# EAGLE board Main Board PCB v29 (EAGLE 9.7.0)
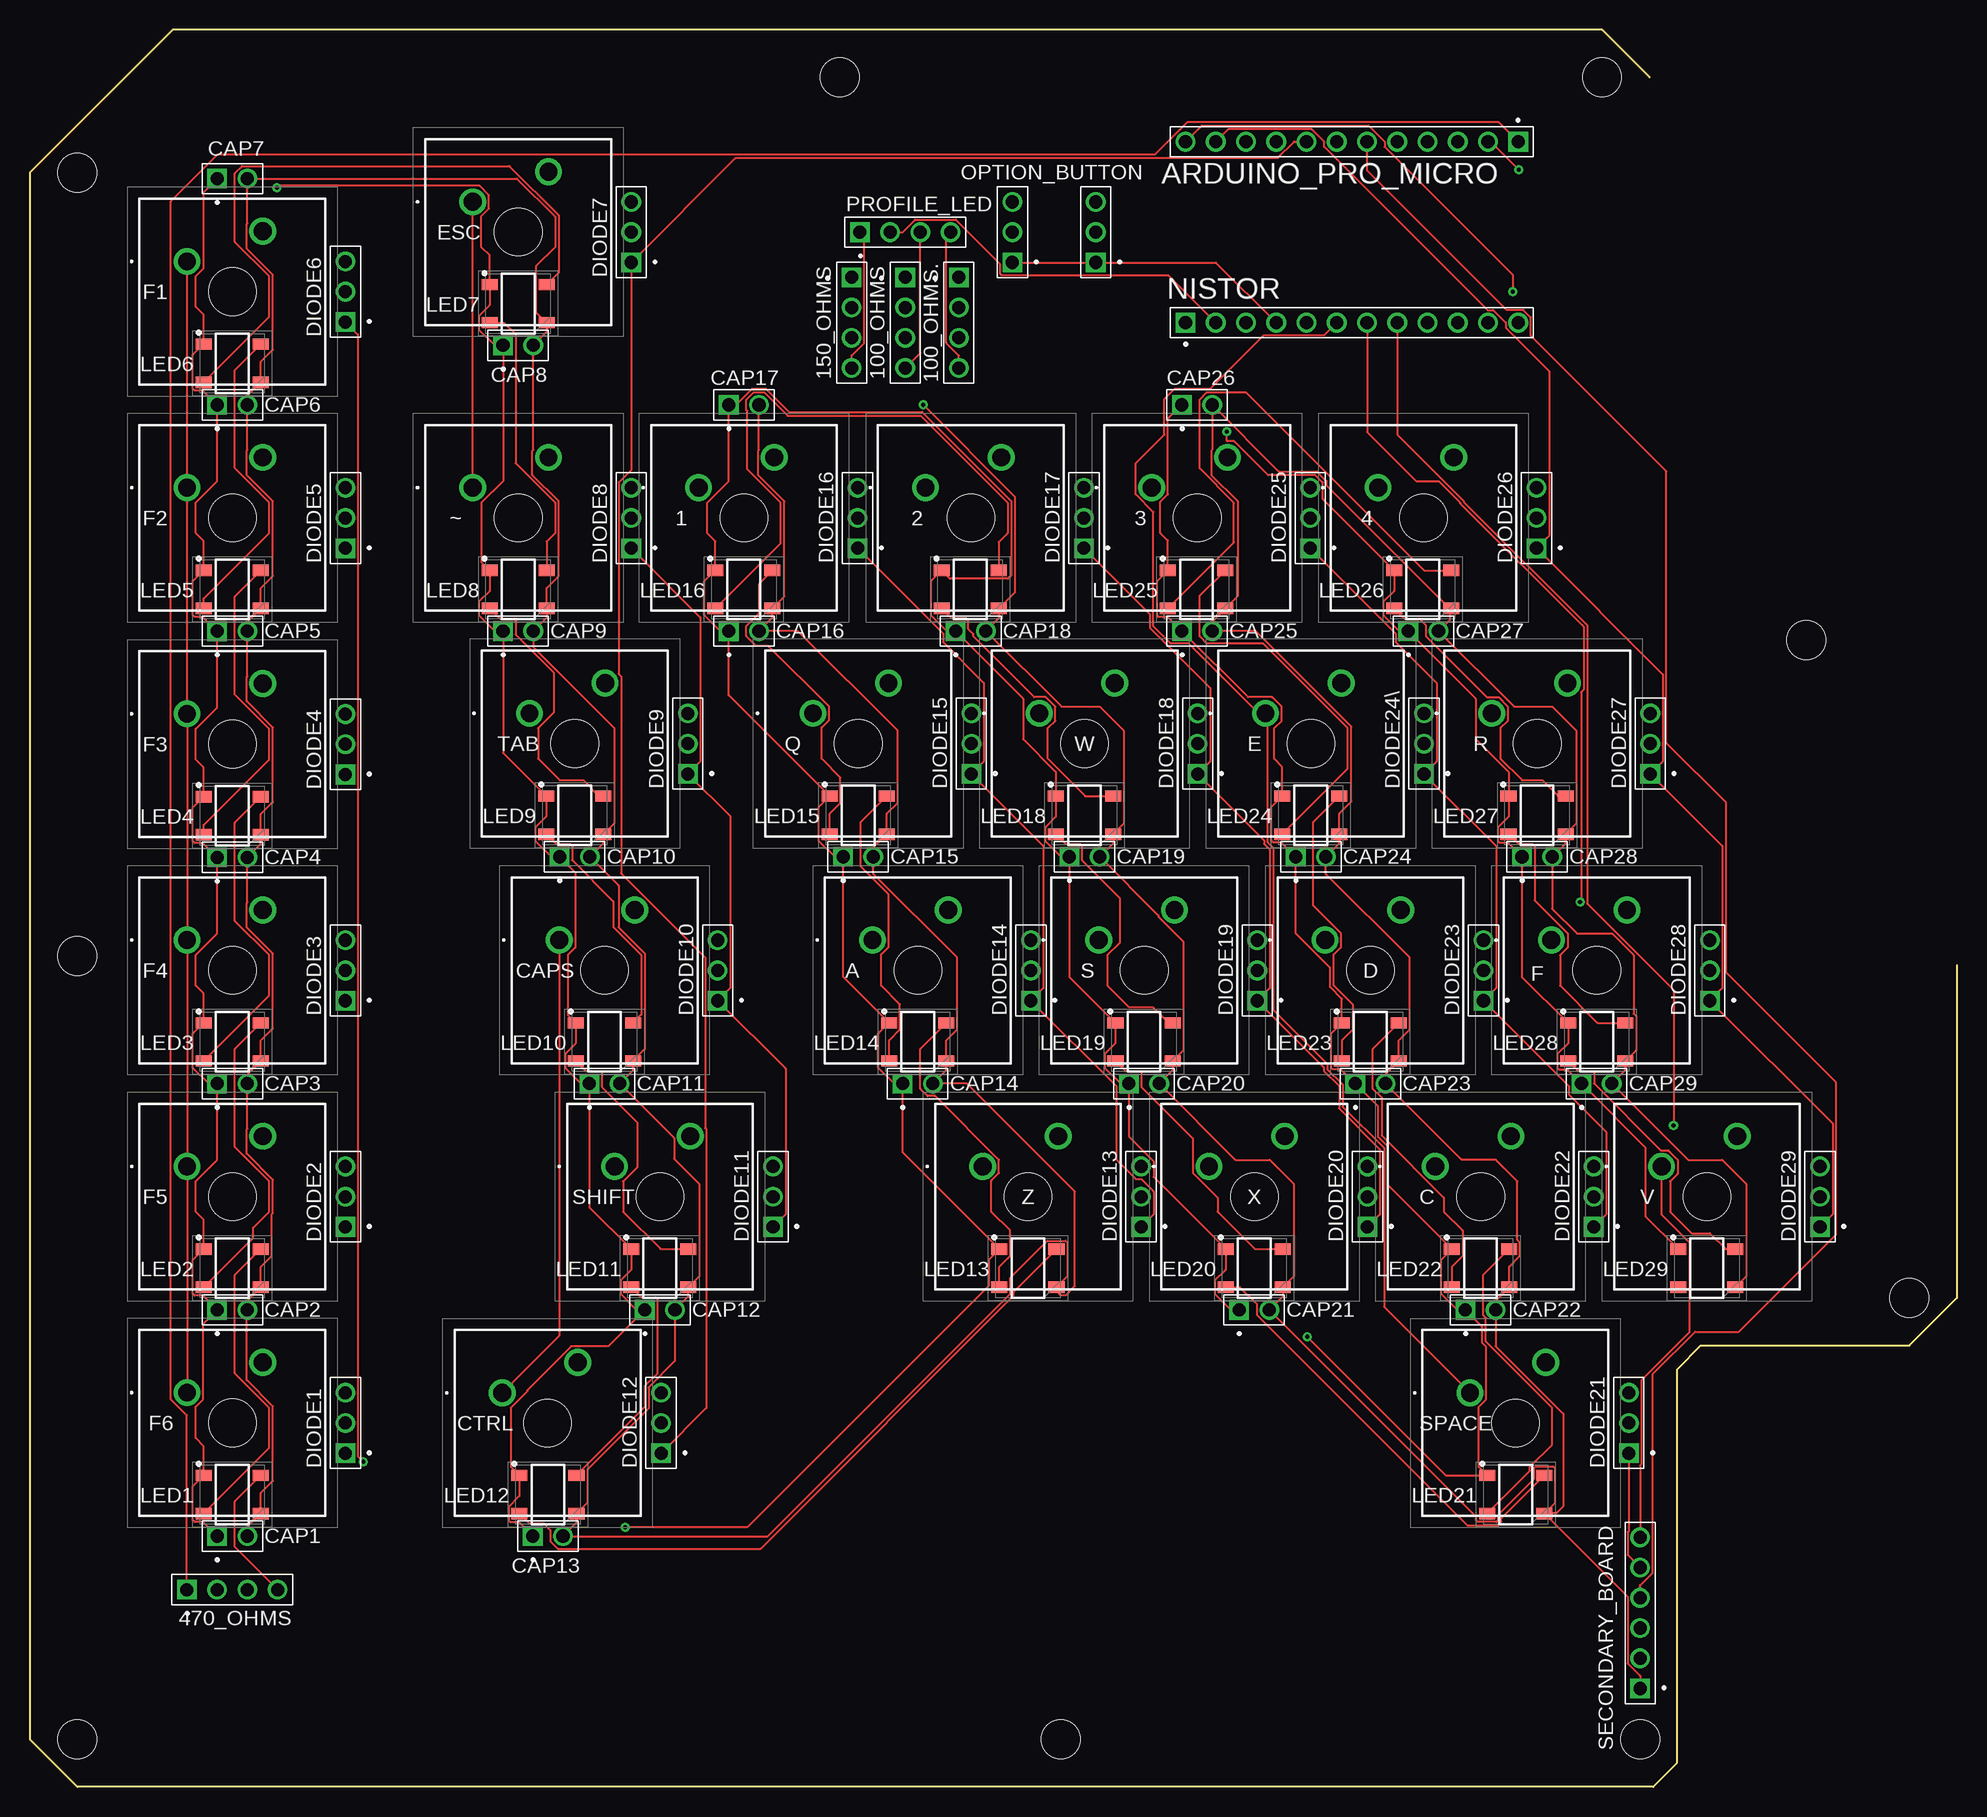
[diagram p0: board, top side]
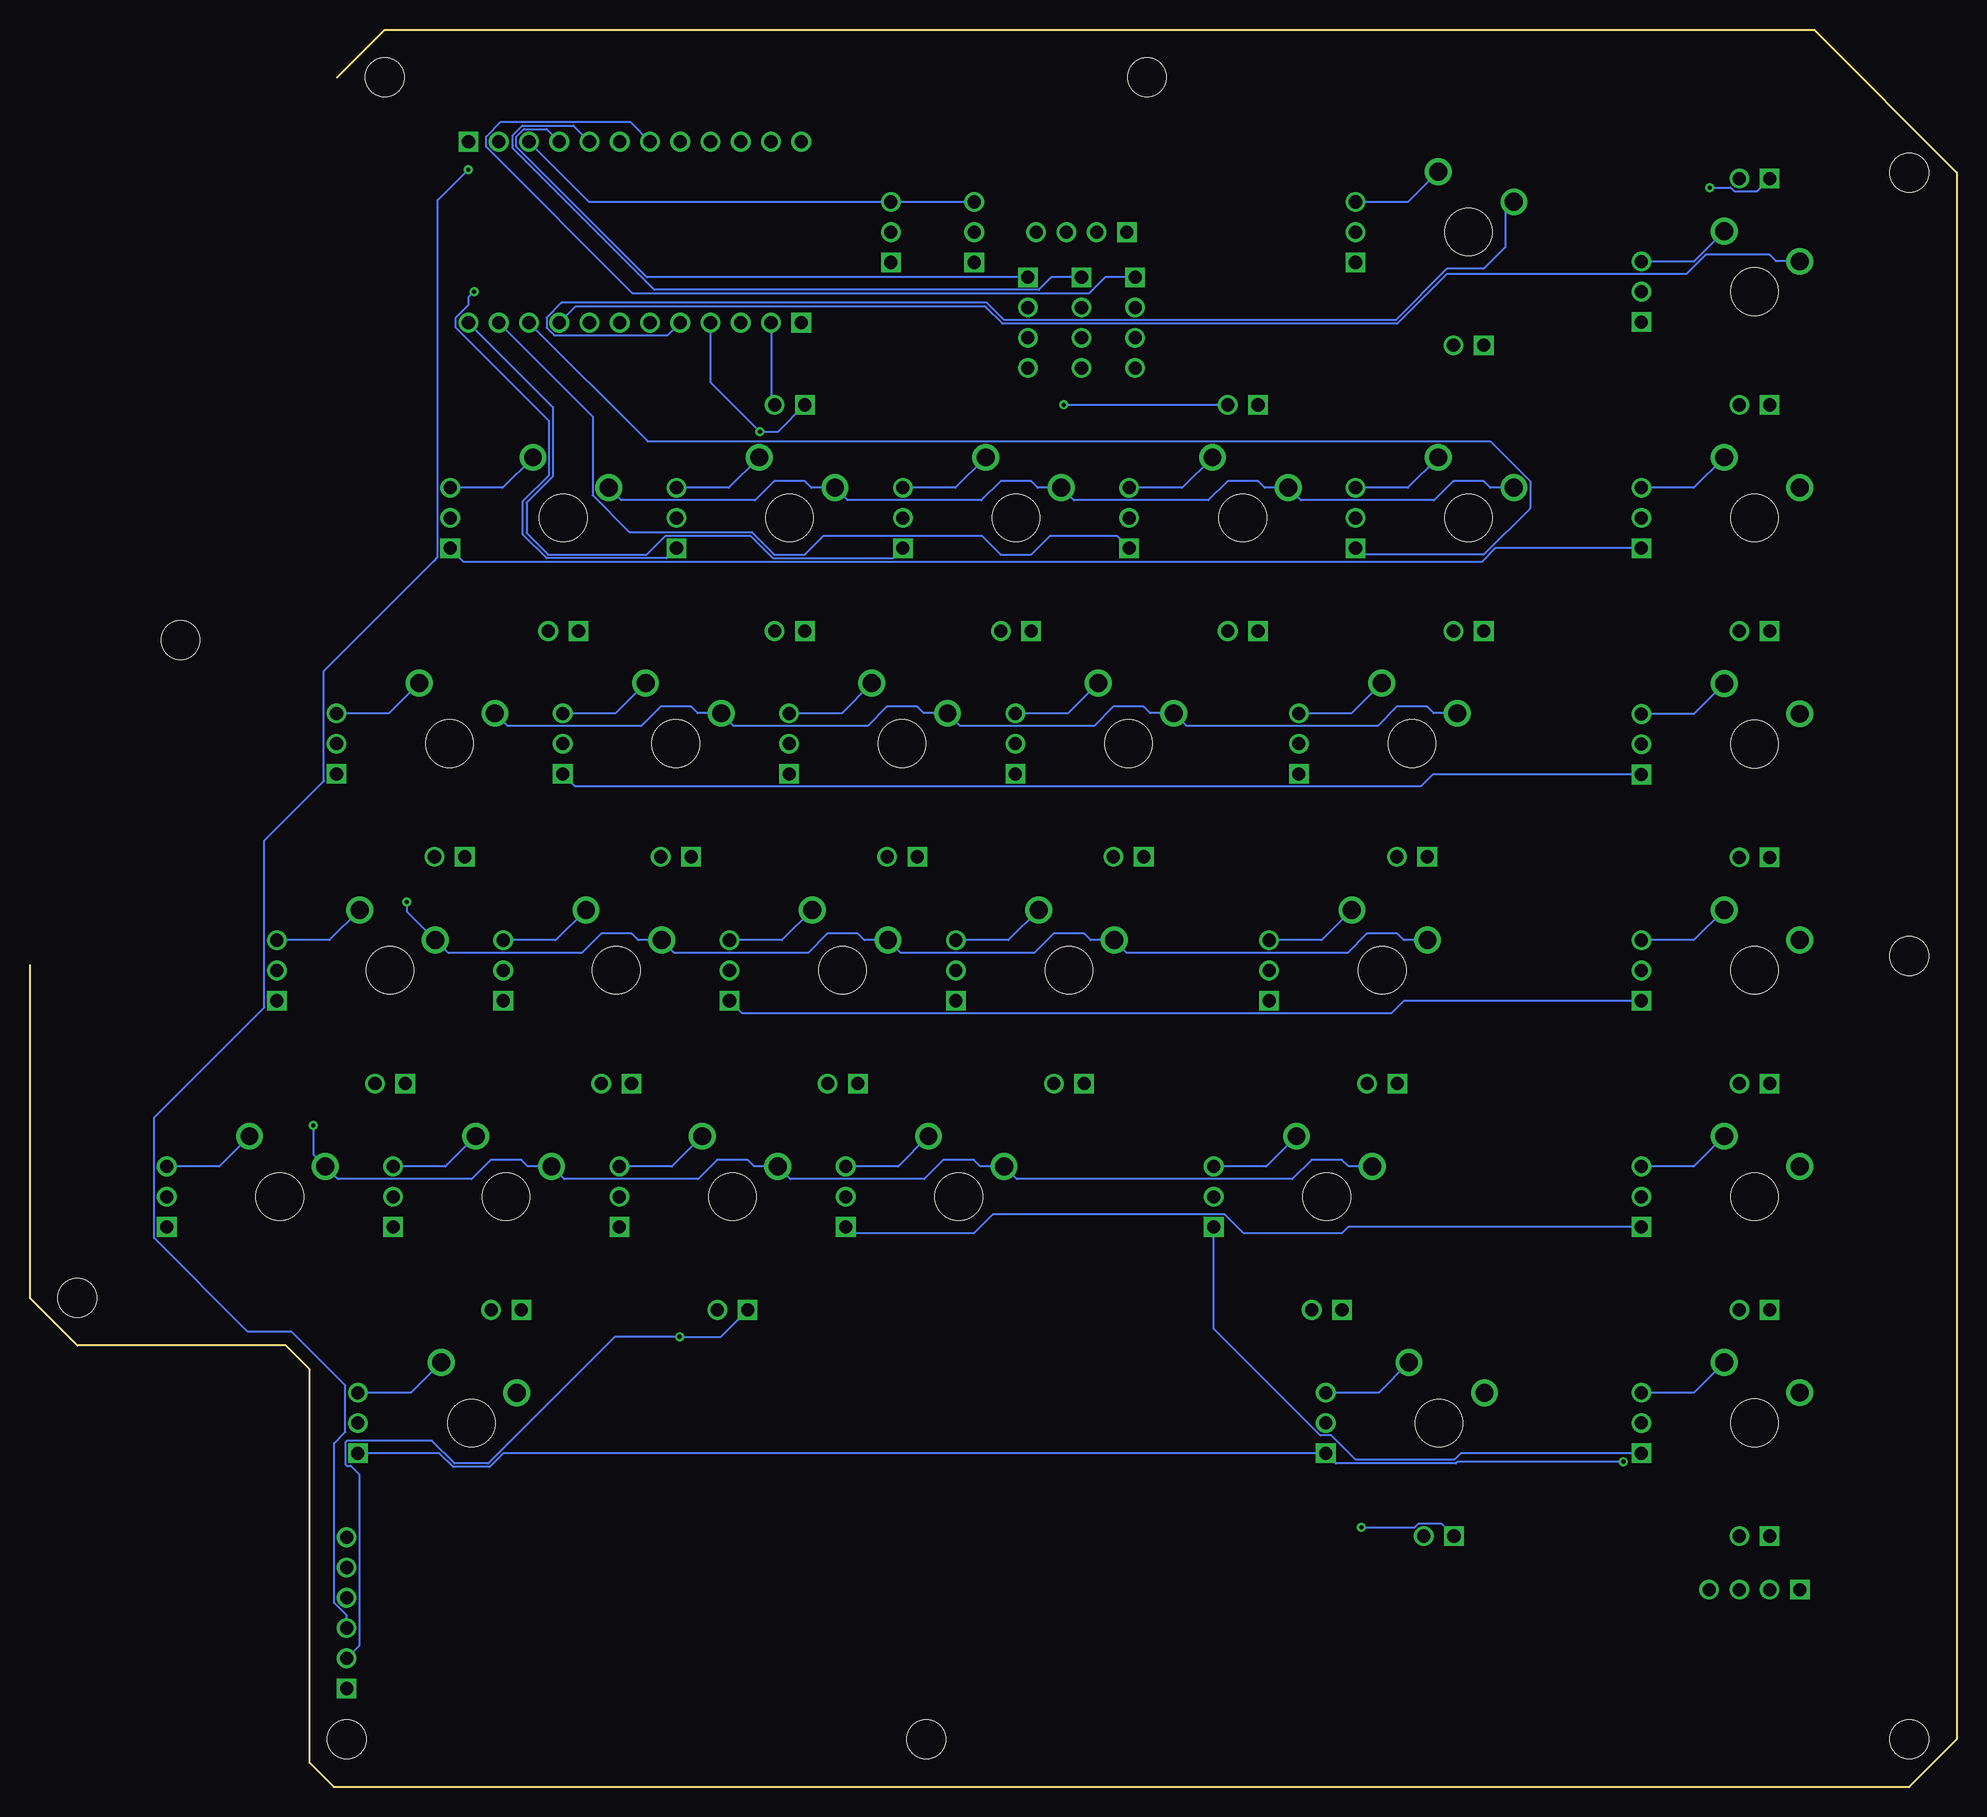
[diagram p1: board, bottom side, seen from below]

Size 161.8 x 147.55 mm. Coordinates in mm from the lower left corner, seen from the top.
Outline: 161.8,69 161.8,41.05 157.8,37.05 140.3,37.05 138.3,35.05 138.3,2 136.3,0 4,0 0,4 0,135.55 12,147.55 132,147.55 136,143.55
Copper layers (1*16): Top / Bottom
Stack-up Default Layer Stack: Top User Defined 0.035mm / Dielectric-1 User Defined 1.5mm / Bottom User Defined 0.035mm
Design rules "default": minimum track width 6mil, minimum drill 0.35mm, track to track 6mil, track to pad 6mil, pad to pad 6mil, via to via 6mil, smd to smd 6mil, copper to edge 40mil, drill to drill 6mil, minimum pad ring 10mil, minimum via ring 8mil, stop-mask expansion 4mil, vias tented up to drill 0mil, thermal gap 10mil
Holes 3.25 mm at 135.2,4 157.8,41.05 4,135.55 4,4 132,143.55 68,143.55 4,69.78 149.15,96.3 86.55,4

## Footprints (pad centres in the part's own frame; a part is rotated, then mirrored left to right if it is on the bottom)
MX1AE1NW = drill 1.499 pad 2.248: 1 0,0; 2 6.35,2.54 | hole 3.988: 3.81,-2.54
61300411121 = drill 1.1 square: 1 -3.81,0 | drill 1.1: 2 -1.27,0; 3 1.27,0; 4 3.81,0
61301211121 = drill 1.1 square: 1 -13.97,0 | drill 1.1: 2 -11.43,0; 3 -8.89,0; 4 -6.35,0; 5 -3.81,0; 6 -1.27,0; 7 1.27,0; 8 3.81,0; 9 6.35,0; 10 8.89,0; 11 11.43,0; 12 13.97,0
61300211121 = drill 1.1 square: 1 -1.27,0 | drill 1.1: 2 1.27,0
61300311121 = drill 1.1 square: 1 -2.54,0 | drill 1.1: 2 0,0; 3 2.54,0
WS2812B = smd 1.35 x 0.95: 1 -2.4,1.6; 2 -2.4,-1.6; 3 2.4,-1.6; 4 2.4,1.6
61300611121 = drill 1.1 square: 1 -6.35,0 | drill 1.1: 2 -3.81,0; 3 -1.27,0; 4 1.27,0; 5 3.81,0; 6 6.35,0

## Placement (x,y rotation side)
1  MX1A-E1NW  [MX1AE1NW]  56.15,109.1 0 top
2  MX1A-E1NW  [MX1AE1NW]  75.2,109.1 0 top
3  MX1A-E1NW  [MX1AE1NW]  94.2,109.1 0 top
4  MX1A-E1NW  [MX1AE1NW]  113.2,109.1 0 top
100_OHMS  61300411121  [61300411121]  73.5,122.95 270 top
100_OHMS.  61300411121  [61300411121]  78,122.95 270 top
150_OHMS  61300411121  [61300411121]  69,122.95 270 top
470_OHMS  61300411121  [61300411121]  17,16.55 0 top
A  MX1A-E1NW  [MX1AE1NW]  70.75,71.1 0 top
ARDUINO_PRO_MICRO  61301211121  [61301211121]  111,138.15 180 top
C  MX1A-E1NW  [MX1AE1NW]  118,52.1 0 top
CAP1  61300211121  [61300211121]  17,21.05 0 top
CAP2  61300211121  [61300211121]  17,40.05 0 top
CAP3  61300211121  [61300211121]  17,59.05 0 top
CAP4  61300211121  [61300211121]  17,78.05 0 top
CAP5  61300211121  [61300211121]  17,97.05 0 top
CAP6  61300211121  [61300211121]  17,116.05 0 top
CAP7  61300211121  [61300211121]  17,135.05 0 top
CAP8  61300211121  [61300211121]  41,121.05 0 top
CAP9  61300211121  [61300211121]  41,97.05 0 top
CAP10  61300211121  [61300211121]  45.75,78.1 0 top
CAP11  61300211121  [61300211121]  48.25,59.05 0 top
CAP12  61300211121  [61300211121]  52.9,40.05 0 top
CAP13  61300211121  [61300211121]  43.5,21.05 0 top
CAP14  61300211121  [61300211121]  74.55,59.05 0 top
CAP15  61300211121  [61300211121]  69.55,78.1 0 top
CAP16  61300211121  [61300211121]  59.95,97.05 0 top
CAP17  61300211121  [61300211121]  59.95,116.05 0 top
CAP18  61300211121  [61300211121]  79,97.05 0 top
CAP19  61300211121  [61300211121]  88.55,78.1 0 top
CAP20  61300211121  [61300211121]  93.55,59.05 0 top
CAP21  61300211121  [61300211121]  102.8,40.05 0 top
CAP22  61300211121  [61300211121]  121.8,40.05 0 top
CAP23  61300211121  [61300211121]  112.55,59.05 0 top
CAP24  61300211121  [61300211121]  107.55,78.1 0 top
CAP25  61300211121  [61300211121]  98,97.05 0 top
CAP26  61300211121  [61300211121]  98,116.05 0 top
CAP27  61300211121  [61300211121]  117,97.05 0 top
CAP28  61300211121  [61300211121]  126.55,78.1 0 top
CAP29  61300211121  [61300211121]  131.55,59.05 0 top
CAPS  MX1A-E1NW  [MX1AE1NW]  44.45,71.1 0 top
CTRL  MX1A-E1NW  [MX1AE1NW]  39.66,33.09 0 top
D  MX1A-E1NW  [MX1AE1NW]  108.75,71.1 0 top
DIODE1  61300311121  [61300311121]  26.5,30.55 90 top
DIODE2  61300311121  [61300311121]  26.5,49.55 90 top
DIODE3  61300311121  [61300311121]  26.5,68.55 90 top
DIODE4  61300311121  [61300311121]  26.5,87.55 90 top
DIODE5  61300311121  [61300311121]  26.5,106.55 90 top
DIODE6  61300311121  [61300311121]  26.5,125.55 90 top
DIODE7  61300311121  [61300311121]  50.5,130.55 90 top
DIODE8  61300311121  [61300311121]  50.5,106.55 90 top
DIODE9  61300311121  [61300311121]  55.25,87.6 90 top
DIODE10  61300311121  [61300311121]  57.75,68.55 90 top
DIODE11  61300311121  [61300311121]  62.4,49.55 90 top
DIODE12  61300311121  [61300311121]  53,30.55 90 top
DIODE13  61300311121  [61300311121]  93.3,49.55 90 top
DIODE14  61300311121  [61300311121]  84.05,68.55 90 top
DIODE15  61300311121  [61300311121]  79.05,87.6 90 top
DIODE16  61300311121  [61300311121]  69.5,106.55 90 top
DIODE17  61300311121  [61300311121]  88.5,106.55 90 top
DIODE18  61300311121  [61300311121]  98.05,87.6 90 top
DIODE19  61300311121  [61300311121]  103.05,68.55 90 top
DIODE20  61300311121  [61300311121]  112.3,49.55 90 top
DIODE21  61300311121  [61300311121]  134.25,30.55 90 top
DIODE22  61300311121  [61300311121]  131.3,49.55 90 top
DIODE23  61300311121  [61300311121]  122.05,68.55 90 top
DIODE24\  61300311121  [61300311121]  117.05,87.6 90 top
DIODE25  61300311121  [61300311121]  107.5,106.55 90 top
DIODE26  61300311121  [61300311121]  126.5,106.55 90 top
DIODE27  61300311121  [61300311121]  136.05,87.6 90 top
DIODE28  61300311121  [61300311121]  141.05,68.55 90 top
DIODE29  61300311121  [61300311121]  150.3,49.55 90 top
E  MX1A-E1NW  [MX1AE1NW]  103.75,90.15 0 top
ESC  MX1A-E1NW  [MX1AE1NW]  37.2,133.1 0 top
F  MX1A-E1NW  [MX1AE1NW]  127.75,71.1 0 top
F1  MX1A-E1NW  [MX1AE1NW]  13.2,128.1 0 top
F2  MX1A-E1NW  [MX1AE1NW]  13.2,109.1 0 top
F3  MX1A-E1NW  [MX1AE1NW]  13.2,90.1 0 top
F4  MX1A-E1NW  [MX1AE1NW]  13.2,71.1 0 top
F5  MX1A-E1NW  [MX1AE1NW]  13.2,52.1 0 top
F6  MX1A-E1NW  [MX1AE1NW]  13.2,33.1 0 top
LED1  WS2812B  [WS2812B]  17,24.55 0 top
LED2  WS2812B  [WS2812B]  17,43.55 0 top
LED3  WS2812B  [WS2812B]  17,62.55 0 top
LED4  WS2812B  [WS2812B]  17,81.55 0 top
LED5  WS2812B  [WS2812B]  17,100.55 0 top
LED6  WS2812B  [WS2812B]  17,119.55 0 top
LED7  WS2812B  [WS2812B]  41,124.55 0 top
LED8  WS2812B  [WS2812B]  41,100.55 0 top
LED9  WS2812B  [WS2812B]  45.75,81.6 0 top
LED10  WS2812B  [WS2812B]  48.25,62.55 0 top
LED11  WS2812B  [WS2812B]  52.9,43.55 0 top
LED12  WS2812B  [WS2812B]  43.5,24.55 0 top
LED13  WS2812B  [WS2812B]  83.8,43.55 0 top
LED14  WS2812B  [WS2812B]  74.55,62.55 0 top
LED15  WS2812B  [WS2812B]  69.55,81.6 0 top
LED16  WS2812B  [WS2812B]  59.95,100.55 0 top
LED17  WS2812B  [WS2812B]  78.95,100.55 0 top
LED18  WS2812B  [WS2812B]  88.55,81.6 0 top
LED19  WS2812B  [WS2812B]  93.55,62.55 0 top
LED20  WS2812B  [WS2812B]  102.8,43.55 0 top
LED21  WS2812B  [WS2812B]  124.75,24.55 0 top
LED22  WS2812B  [WS2812B]  121.8,43.55 0 top
LED23  WS2812B  [WS2812B]  112.55,62.55 0 top
LED24  WS2812B  [WS2812B]  107.55,81.6 0 top
LED25  WS2812B  [WS2812B]  97.95,100.55 0 top
LED26  WS2812B  [WS2812B]  116.95,100.55 0 top
LED27  WS2812B  [WS2812B]  126.55,81.6 0 top
LED28  WS2812B  [WS2812B]  131.55,62.55 0 top
LED29  WS2812B  [WS2812B]  140.8,43.55 0 top
NISTOR  61301211121  [61301211121]  111,122.95 0 top
OPTION_BUTTON  61300311121  [61300311121]  89.5,130.55 90 top
OPTION_BUTTON.  61300311121  [61300311121]  82.5,130.55 90 top
PROFILE_LED  61300411121  [61300411121]  73.5,130.55 0 top
Q  MX1A-E1NW  [MX1AE1NW]  65.75,90.15 0 top
R  MX1A-E1NW  [MX1AE1NW]  122.75,90.15 0 top
S  MX1A-E1NW  [MX1AE1NW]  89.75,71.1 0 top
SECONDARY_BOARD  61300611121  [61300611121]  135.2,14.6 90 top
SHIFT  MX1A-E1NW  [MX1AE1NW]  49.1,52.1 0 top
SPACE  MX1A-E1NW  [MX1AE1NW]  120.92,33.09 0 top
TAB  MX1A-E1NW  [MX1AE1NW]  41.95,90.15 0 top
V  MX1A-E1NW  [MX1AE1NW]  137,52.1 0 top
W  MX1A-E1NW  [MX1AE1NW]  84.75,90.15 0 top
X  MX1A-E1NW  [MX1AE1NW]  99,52.1 0 top
Z  MX1A-E1NW  [MX1AE1NW]  80,52.1 0 top
~  MX1A-E1NW  [MX1AE1NW]  37.2,109.1 0 top

## Library data of the parts
1-4 A C CAPS CTRL D E ESC F F1-F6 Q R S SHIFT SPACE TAB V W X Z ~ = SamacSys_Parts; DESCRIPTION: Pushbutton Switches Full Travel, Mech. Keyswitch, Click Tactile Feel (Blue stem), 60cN, No LED, No Diode, Fixation Pins for PCB Mounting; HEIGHT: 15.2mm; MANUFACTURER_NAME: Cherry; MANUFACTURER_PART_NUMBER: MX1A-E1NW; MOUSER_PART_NUMBER: 540-MX1A-E1NW; MOUSER_PRICE-STOCK: https://www.mouser.co.uk/ProductDetail/CHERRY/MX1A-E1NW/?qs=Z7NFYKyvgJd45Wm4xzFv7w%3D%3D
100_OHMS 100_OHMS. 150_OHMS 470_OHMS PROFILE_LED = Headers; CREATED_BY: PCBLayout.com; DIGI_KEY_PART_NUMBER: 732-5317-ND; MANUFACTURER: Wurth Electronics Inc.; MPN: 61300411121
ARDUINO_PRO_MICRO NISTOR = Headers; CREATED_BY: PCBLayout.com; DIGIKEY_PART_NUMBER: 732-5323-ND; MANUFACTURER: Wurth Electronics Inc.; MPN: 61301211121
CAP1-CAP29 = Headers; CREATED_BY: PCBLayout.com; DIGI_KEY_PART_NUMBER: 732-5315-ND; MANUFACTURER: Wurth Electronics Inc.; MPN: 61300211121
DIODE1-DIODE23 DIODE24\ DIODE25-DIODE29 OPTION_BUTTON OPTION_BUTTON. = Headers; CREATED_BY: PCBLayout.com; DIGI_KEY_PART_NUMBER: 732-5316-ND; MANUFACTURER: Wurth Electronics Inc.; MPN: 61300311121
LED1-LED29 = WS2812B; DESCRIPTION: Intelligent control LED integrated light source; HEIGHT: mm; MANUFACTURER_NAME: Worldsemi; MANUFACTURER_PART_NUMBER: WS2812B
SECONDARY_BOARD = Headers; CREATED_BY: PCBLayout.com; DIGI_KEY_PART_NUMBER: 732-5319-ND; MANUFACTURER: Wurth Electronics Inc.; MPN: 61300611121

## Nets
N$1: DIODE8.3 ~.2
N$2: DIODE9.3 TAB.2
N$3: CAPS.2 DIODE10.3
N$4: DIODE11.3 SHIFT.2
N$5: DIODE1.3 F6.2
N$6: 1.2 DIODE16.3
N$7: DIODE15.3 Q.2
N$8: A.2 DIODE14.3
N$9: DIODE13.3 Z.2
N$10: DIODE2.3 F5.2
N$11: DIODE3.3 F4.2
N$12: DIODE20.3 X.2
N$13: DIODE19.3 S.2
N$14: DIODE18.3 W.2
N$15: 2.2 DIODE17.3
N$16: 3.2 DIODE25.3
N$17: DIODE24\.3 E.2
N$18: D.2 DIODE23.3
N$19: C.2 DIODE22.3
N$20: DIODE4.3 F3.2
N$21: DIODE5.3 F2.2
N$22: DIODE29.3 V.2
N$23: DIODE28.3 F.2
N$24: DIODE27.3 R.2
N$25: 4.2 DIODE26.3
N$26: DIODE7.3 ESC.2
N$27: DIODE21.3 SPACE.2
N$28: CTRL.2 DIODE12.3
N$29: DIODE6.3 F1.2
N$30: 1.1 2.1 3.1 4.1 ESC.1 NISTOR.5 ~.1
N$31: E.1 NISTOR.6 Q.1 R.1 SPACE.1 TAB.1 W.1
N$32: A.1 CAPS.1 CTRL.1 D.1 F.1 NISTOR.7 S.1
N$33: C.1 NISTOR.8 SECONDARY_BOARD.6 SHIFT.1 V.1 X.1 Z.1
N$34: F1.1 F2.1 F3.1 F4.1 F5.1 F6.1 NISTOR.9
N$35: DIODE1.1 DIODE8.1 DIODE9.1 DIODE10.1 DIODE11.1 NISTOR.10
N$36: DIODE2.1 DIODE13.1 DIODE14.1 DIODE15.1 DIODE16.1 NISTOR.11
N$37: DIODE3.1 DIODE17.1 DIODE18.1 DIODE19.1 DIODE20.1 NISTOR.12
N$38: ARDUINO_PRO_MICRO.12 DIODE4.1 DIODE22.1 DIODE23.1 DIODE24\.1 DIODE25.1
N$39: ARDUINO_PRO_MICRO.11 DIODE5.1 DIODE26.1 DIODE27.1 DIODE28.1 DIODE29.1
N$40: ARDUINO_PRO_MICRO.8 DIODE6.1 DIODE7.1 DIODE12.1 DIODE21.1 SECONDARY_BOARD.5
N$41: 150_OHMS.1 ARDUINO_PRO_MICRO.7
N$42: CAP1.1 CAP2.1 CAP3.1 CAP4.1 CAP5.1 CAP6.1 CAP7.1 CAP8.1 CAP9.1 CAP10.1 CAP11.1 CAP12.1 CAP13.1 CAP14.1 CAP15.1 CAP16.1 CAP17.1 CAP18.1 CAP19.1 CAP20.1 CAP21.1 CAP22.1 CAP23.1 CAP24.1 CAP25.1 CAP26.1 CAP27.1 CAP28.1 CAP29.1 LED1.1 LED2.1 LED3.1 LED4.1 LED5.1 LED6.1 LED7.1 LED8.1 LED9.1 LED10.1 LED11.1 LED12.1 LED13.1 LED14.1 LED15.1 LED16.1 LED17.1 LED18.1 LED19.1 LED20.1 LED21.1 LED22.1 LED23.1 LED24.1 LED25.1 LED26.1 LED27.1 LED28.1 LED29.1 NISTOR.4 OPTION_BUTTON.1 OPTION_BUTTON..1 SECONDARY_BOARD.2
N$43: ARDUINO_PRO_MICRO.6 SECONDARY_BOARD.4
N$44: ARDUINO_PRO_MICRO.3 OPTION_BUTTON.3 OPTION_BUTTON..3
N$45: 150_OHMS.4 PROFILE_LED.1
N$46: 100_OHMS.4 PROFILE_LED.3
N$47: 100_OHMS..4 PROFILE_LED.4
N$48: 470_OHMS.4 LED1.4
N$49: CAP1.2 CAP2.2 CAP3.2 CAP4.2 CAP5.2 CAP6.2 CAP7.2 CAP8.2 CAP9.2 CAP10.2 CAP11.2 CAP12.2 CAP13.2 CAP14.2 CAP15.2 CAP16.2 CAP17.2 CAP18.2 CAP19.2 CAP20.2 CAP21.2 CAP22.2 CAP23.2 CAP24.2 CAP25.2 CAP26.2 CAP27.2 CAP28.2 CAP29.2 LED1.3 LED2.3 LED3.3 LED4.3 LED5.3 LED6.3 LED7.3 LED8.3 LED9.3 LED10.3 LED11.3 LED12.3 LED13.3 LED14.3 LED15.3 LED16.3 LED17.3 LED18.3 LED19.3 LED20.3 LED21.3 LED22.3 LED23.3 LED24.3 LED25.3 LED26.3 LED27.3 LED28.3 LED29.3 NISTOR.2 PROFILE_LED.2 SECONDARY_BOARD.1
N$50: 100_OHMS.1 ARDUINO_PRO_MICRO.5
N$51: LED1.2 LED2.4
N$52: LED2.2 LED3.4
N$53: LED3.2 LED4.4
N$54: LED4.2 LED5.4
N$55: LED5.2 LED6.4
N$56: LED6.2 LED7.4
N$57: LED7.2 LED8.4
N$58: LED8.2 LED9.4
N$59: LED9.2 LED10.4
N$60: LED10.2 LED11.4
N$61: LED11.2 LED12.4
N$62: LED12.2 LED13.4
N$63: LED13.2 LED14.4
N$64: LED14.2 LED15.4
N$65: LED15.2 LED16.4
N$66: LED16.2 LED17.4
N$67: LED17.2 LED18.4
N$68: LED18.2 LED19.4
N$69: LED19.2 LED20.4
N$70: LED20.2 LED21.4
N$71: LED21.2 LED22.4
N$72: LED22.2 LED23.4
N$73: LED23.2 LED24.4
N$74: LED24.2 LED25.4
N$75: LED25.2 LED26.4
N$76: LED26.2 LED27.4
N$77: LED27.2 LED28.4
N$78: LED28.2 LED29.4
N$79: 100_OHMS..1 ARDUINO_PRO_MICRO.4
N$80: ARDUINO_PRO_MICRO.2 SECONDARY_BOARD.3
N$81: 470_OHMS.1 ARDUINO_PRO_MICRO.1

## Tracks (layer width: path | path; a pad name or v marks a point on that pad's centre or on a via)
N$1
  Bottom 0.152: ~.2 46.1,109.09 DIODE8.3
N$2
  Bottom 0.152: TAB.2 50.85,90.14 DIODE9.3
N$3
  Bottom 0.152: CAPS.2 53.35,71.09 DIODE10.3
N$4
  Bottom 0.152: SHIFT.2 58,52.09 DIODE11.3
N$5
  Bottom 0.152: F6.2 22.1,33.09 DIODE1.3
N$6
  Bottom 0.152: 1.2 65.05,109.09 DIODE16.3
N$7
  Bottom 0.152: Q.2 74.65,90.14 DIODE15.3
N$8
  Bottom 0.152: A.2 79.65,71.09 DIODE14.3
N$9
  Bottom 0.152: Z.2 88.9,52.09 DIODE13.3
N$10
  Bottom 0.152: F5.2 22.1,52.09 DIODE2.3
N$11
  Bottom 0.152: F4.2 22.1,71.09 DIODE3.3
N$12
  Bottom 0.152: X.2 107.9,52.09 DIODE20.3
N$13
  Bottom 0.152: S.2 98.65,71.09 DIODE19.3
N$14
  Bottom 0.152: W.2 93.65,90.14 DIODE18.3
N$15
  Bottom 0.152: 2.2 84.1,109.09 DIODE17.3
N$16
  Bottom 0.152: 3.2 103.1,109.09 DIODE25.3
N$17
  Bottom 0.152: E.2 112.65,90.14 DIODE24\.3
N$18
  Bottom 0.152: D.2 117.65,71.09 DIODE23.3
N$19
  Bottom 0.152: C.2 126.9,52.09 DIODE22.3
N$20
  Bottom 0.152: F3.2 22.1,90.09 DIODE4.3
N$21
  Bottom 0.152: F2.2 22.1,109.09 DIODE5.3
N$22
  Bottom 0.152: V.2 145.9,52.09 DIODE29.3
N$23
  Bottom 0.152: F.2 136.65,71.09 DIODE28.3
N$24
  Bottom 0.152: R.2 131.65,90.14 DIODE27.3
N$25
  Bottom 0.152: 4.2 122.1,109.09 DIODE26.3
N$26
  Bottom 0.152: ESC.2 46.1,133.09 DIODE7.3
N$27
  Bottom 0.152: SPACE.2 129.81,33.09 DIODE21.3
N$28
  Bottom 0.152: CTRL.2 48.55,33.09 DIODE12.3
N$29
  Bottom 0.152: F1.2 22.1,128.09 DIODE6.3
N$30
  Top 0.152: ~.1 ESC.1
  Bottom 0.152: ~.1 39.19,109.1 39.73,109.65 42.29,109.65 43.9,108.04 55.09,108.04 1.1 58.14,109.1 58.68,109.65 61.24,109.65 62.85,108.04 74.14,108.04 2.1 77.19,109.1 77.73,109.65 80.29,109.65 81.9,108.04 93.14,108.04 3.1 96.19,109.1 96.73,109.65 99.29,109.65 100.9,108.04 112.14,108.04 4.1 | ESC.1 37.92,132.38 37.92,129.28 39.73,127.47 42.83,127.47 47.13,123.17 80,123.17 81.45,124.61 117.18,124.61 118.4,123.39 118.4,122.51 117.79,121.9 108.24,121.9 NISTOR.5
N$31
  Top 0.152: SPACE.1 113.69,40.31 113.69,53.63 110.23,57.1 110.23,58.97 108.94,60.25 108.94,60.69 104.41,65.22 104.41,78.84 103.94,79.3 103.94,89.96 E.1 103.15,90.15 97.3,96 95.81,96 94.34,97.47 94.34,107.05 92.85,108.54 92.85,111.15 95.25,113.55 95.25,116.54 96.11,117.41 99.11,117.41 103.6,121.9 108.68,121.9 NISTOR.6
  Bottom 0.152: TAB.1 43.94,90.15 44.48,90.7 47.04,90.7 48.65,89.09 64.69,89.09 Q.1 67.74,90.15 68.28,90.7 70.84,90.7 72.45,89.09 83.69,89.09 W.1 86.74,90.15 87.28,90.7 89.84,90.7 91.45,89.09 102.69,89.09 E.1 105.74,90.15 106.28,90.7 108.84,90.7 110.45,89.09 121.69,89.09 R.1
N$32  (via drill 0.35)
  Top 0.152: CAPS.1 44.45,37.88 CTRL.1 | NISTOR.7 112.27,113.78 116.4,109.65 118.29,109.65 120.1,107.84 120.1,107.77 130.45,97.42 130.45,92.13 130.25,91.93 130.25,74.4 v130.15,74.3
  Bottom 0.152: CAPS.1 46.44,71.1 46.98,71.65 49.54,71.65 51.15,70.04 69.69,70.04 A.1 72.74,71.1 73.28,71.65 75.84,71.65 77.45,70.04 88.69,70.04 S.1 91.74,71.1 92.28,71.65 94.84,71.65 96.45,70.04 107.69,70.04 D.1 110.74,71.1 111.28,71.65 113.84,71.65 115.45,70.04 126.69,70.04 F.1 130.15,73.5 v130.15,74.3
N$33  (via drill 0.35)
  Top 0.152: V.1 137,48.02 139.3,45.72 139.3,38.14 135.3,34.14 135.3,27.09 135.2,26.99 SECONDARY_BOARD.6 | NISTOR.8 114.81,113.56 120.4,107.97 120.4,107.9 130.76,97.54 130.76,74.16 138,66.92 v138,55.55
  Bottom 0.152: SHIFT.1 51.09,52.1 51.63,52.65 54.19,52.65 55.8,51.04 78.94,51.04 Z.1 81.99,52.1 82.53,52.65 85.09,52.65 86.7,51.04 97.94,51.04 X.1 100.99,52.1 101.53,52.65 104.09,52.65 105.7,51.04 116.94,51.04 C.1 119.99,52.1 120.53,52.65 123.09,52.65 124.7,51.04 135.94,51.04 V.1 138,53.1 v138,55.55
N$34
  Top 0.152: F1.1 F2.1 F3.1 F4.1 F5.1 F6.1
  Bottom 0.152: F1.1 15.19,128.1 15.73,128.65 21.11,128.65 22.72,127.04 42.83,127.04 47.01,122.86 80.13,122.86 81.58,124.31 115.99,124.31 NISTOR.9
N$35
  Top 0.152: DIODE8.1 56.3,98.21 56.3,86.11 DIODE9.1 58.8,81.51 58.8,67.06 DIODE10.1 63.45,60.31 63.45,48.06 DIODE11.1
  Bottom 0.152: DIODE1.1 41.65,28.01 42.2,27.46 50.48,27.46 52.51,29.5 53.44,29.5 62.4,38.46 DIODE11.1 | NISTOR.10 109.93,112.99 39.18,112.99 35.85,109.66 35.85,107.36 39.73,103.47 49.96,103.47 DIODE8.1
N$36
  Top 0.152: DIODE16.1 76.68,96.83 76.68,96.13 80.1,92.7 80.1,86.11 DIODE15.1 85.1,79.01 85.1,67.06 DIODE14.1 91.23,58.83 91.23,52.67 92.86,51.04 93.3,51.04 94.35,49.99 94.35,48.06 DIODE13.1
  Bottom 0.152: DIODE2.1 51.1,47.01 51.63,46.47 59.89,46.47 61.48,48.06 80.94,48.06 82.53,46.47 92.76,46.47 DIODE13.1 | NISTOR.11 114.55,115.07 114.55,108.47 111.45,105.37 101.18,105.37 99.29,103.47 96.73,103.47 95.14,105.06 81.88,105.06 80.29,103.47 77.73,103.47 76.14,105.06 70.55,105.06 DIODE16.1
N$37
  Top 0.152: DIODE20.1 113.35,48.06 113.35,53.54 109.92,56.97 109.92,58.84 108.64,60.13 108.64,60.42 DIODE19.1 104.1,67.06 104.1,78.71 103.64,79.18 103.64,79.47 DIODE18.1 99.1,86.11 99.1,92.27 94.04,97.34 94.04,98.47 DIODE17.1
  Bottom 0.152: DIODE3.1 46.45,66.01 47.5,64.96 102,64.96 DIODE19.1 | DIODE17.1 89.34,103.17 99.42,103.17 101.31,105.06 108.42,105.06 110.01,103.47 118.29,103.47 120.1,105.28 120.1,107.84 117.89,110.04 117.89,115.87 NISTOR.12
N$38  (via drill 0.35)
  Top 0.152: DIODE25.1 114.68,96.83 114.68,96.13 118.1,92.7 118.1,86.11 DIODE24\.1 123.1,79.01 123.1,67.06 DIODE23.1 129.23,58.83 129.23,58.13 132.35,55 132.35,48.06 DIODE22.1 | ARDUINO_PRO_MICRO.12 98.39,139.51 112.4,139.51 113.76,138.15 113.76,137.71 124.5,126.97 v124.5,125.55
  Bottom 0.152: DIODE4.1 44,85.01 45,84.01 116,84.01 DIODE24\.1 | DIODE25.1 108.34,103.17 118.42,103.17 120.4,105.16 120.4,107.97 118.2,110.17 118.2,114.69 126.02,122.51 126.02,123.39 124.97,124.44 124.97,125.08 v124.5,125.55
N$39
  Top 0.152: DIODE29.1 151.35,48.06 151.35,55.71 DIODE28.1 142.1,67.06 142.1,79.01 DIODE27.1 137.1,86.11 137.1,93.41 DIODE26.1 127.55,105.06 127.55,118.88 123.92,122.51 123.92,122.95 122.87,124 122.39,124 108.68,137.71 108.68,138.15 107.63,139.2 100.62,139.2 ARDUINO_PRO_MICRO.11
  Bottom 0.152: DIODE5.1 38.77,104.01 39.91,102.86 125.35,102.86 DIODE26.1
N$40  (via drill 0.35)
  Top 0.152: DIODE6.1 27.55,121.96 27.55,27.75 v28,27.3 | DIODE12.1 56.8,31.81 56.8,55.2 56.7,55.31 56.7,69.66 49.65,76.7 49.65,93.25 49.45,93.46 49.45,109.53 50.5,110.58 DIODE7.1 59.28,136.79 104.78,136.79 106.14,138.15 ARDUINO_PRO_MICRO.8 | DIODE21.1 134.25,21.49 134.15,21.39 134.15,19.46 SECONDARY_BOARD.5
  Bottom 0.152: v28,27.3 41.93,27.3 42.07,27.16 52.15,27.16 DIODE12.1 122.04,28.01 123.19,26.85 126.26,26.85 127.41,28.01 DIODE21.1
N$41
  Bottom 0.152: 150_OHMS.1 71.53,126.76 72.89,125.4 99.5,125.4 99.52,125.4 111.17,125.4 123.48,137.71 123.48,138.59 122.26,139.81 111.39,139.81 ARDUINO_PRO_MICRO.7
N$42  (via drill 0.35)
  Top 0.152: CAP1.1 14.53,22.25 13.83,22.25 13.7,22.38 13.7,25.25 LED1.1 14.6,28.61 13.92,29.28 13.92,31.91 14.55,32.54 14.55,38.87 CAP2.1 14.53,41.25 13.83,41.25 13.7,41.38 13.7,44.25 LED2.1 14.6,47.61 13.92,48.28 13.92,50.84 15.73,52.64 CAP3.1 15.03,59.05 13.7,60.38 13.7,63.25 LED3.1 14.6,66.61 13.92,67.28 13.92,69.84 15.73,71.64 CAP4.1 14.53,79.25 13.83,79.25 13.7,79.38 13.7,82.25 LED4.1 14.6,85.61 13.92,86.28 13.92,88.84 15.73,90.64 CAP5.1 14.53,98.25 13.83,98.25 13.7,98.38 13.7,101.25 LED5.1 14.6,104.61 13.92,105.28 13.92,107.84 15.73,109.64 CAP6.1 14.53,117.25 13.83,117.25 13.7,117.38 13.7,120.25 LED6.1 14.6,123.61 13.92,124.28 13.92,126.84 14.6,127.51 14.6,133.92 CAP7.1 | v20.75,134.3 20.9,134.45 37.76,134.45 38.55,133.66 38.55,132.54 37.92,131.91 37.92,129.28 38.6,128.61 LED7.1 38.6,124.42 37.7,123.52 37.7,122.38 39.03,121.05 CAP8.1 39.73,109.64 37.92,107.84 37.92,102.83 LED8.1 38.6,100.42 37.7,99.52 37.7,98.38 39.03,97.05 CAP9.1 39.73,86.82 LED9.1 43.35,81.47 42.45,80.57 42.45,79.43 43.78,78.1 CAP10.1 45.8,76.78 45.8,70.47 45.17,69.84 45.17,64.83 LED10.1 45.85,62.42 44.95,61.52 44.95,60.38 46.28,59.05 CAP11.1 46.98,48.67 LED11.1 50.5,43.42 49.6,42.52 49.6,41.38 50.93,40.05 CAP12.1 48.56,36.98 45.45,36.98 41.75,33.28 41.75,33.19 40.39,31.83 40.39,26.86 LED12.1 41.1,24.42 40.2,23.52 40.2,22.38 40.33,22.25 41.03,22.25 CAP13.1 | v50,21.8 60.25,21.8 80.5,42.05 80.5,44.25 LED13.1 73.28,53.27 CAP14.1 72.58,59.05 71.25,60.38 71.25,63.25 LED14.1 68.28,68.02 CAP15.1 67.58,78.1 66.25,79.43 66.25,82.3 LED15.1 58.68,91.67 CAP16.1 57.98,97.05 56.65,98.38 56.65,101.25 LED16.1 57.55,104.61 56.87,105.28 56.87,107.84 58.68,109.64 CAP17.1 59.3,116.05 60.66,117.41 61.78,117.41 63.75,115.44 74.92,115.44 82.4,107.97 82.4,101.73 82.12,101.45 77.25,101.45 LED17.1 75.65,101.25 75.65,98.38 76.98,97.05 CAP18.1 83.4,91.38 83.4,87.98 86.15,85.23 LED18.1 86.15,81.47 85.25,80.57 85.25,79.43 86.58,78.1 CAP19.1 87.28,68.02 LED19.1 91.15,62.42 90.25,61.52 90.25,60.38 91.58,59.05 CAP20.1 92.28,54.6 94.35,52.53 94.35,51.2 LED20.1 100.4,43.42 99.5,42.52 99.5,41.38 100.83,40.05 CAP21.1
  Top 0.152: v107.25,37.8 118.9,26.15 LED21.1 121.64,26.86 121.64,31.9 122.27,32.53 122.27,36.94 121.94,37.26 121.94,38.64 CAP22.1 119.83,40.05 118.5,41.38 118.5,44.25 LED22.1 114,50.55 114,53.76 113.19,54.56 113.19,57.14 CAP23.1 110.08,60.25 109.38,60.25 109.25,60.38 109.25,63.25 LED23.1 110.15,66.18 109.17,67.16 109.17,68.77 106.28,71.66 CAP24.1 105.08,79.3 104.38,79.3 104.25,79.43 104.25,82.3 LED24.1 105.15,85.66 104.47,86.33 104.47,88.89 105.1,89.52 105.1,90.71 104.31,91.5 102.28,91.5 CAP25.1 95.53,98.25 94.78,98.25 94.65,98.38 94.65,101.25 LED25.1 95.55,104.66 94.92,105.28 94.92,107.91 95.55,108.54 95.55,114.87 CAP26.1 | v100.5,113.8 100.5,113.05 100.56,112.99 101.11,112.99 103.96,110.14 107.94,110.14 108.55,109.53 108.55,108.15 LED26.1 114.55,100.42 113.65,99.52 113.65,98.38 114.98,97.05 CAP27.1 121.4,91.38 121.4,87.98 124.15,85.23 LED27.1 124.15,81.47 123.25,80.57 123.25,79.43 123.38,79.3 124.08,79.3 CAP28.1 125.28,68.02 LED28.1 129.15,62.42 128.25,61.52 128.25,60.38 128.38,60.25 129.08,60.25 CAP29.1 135.65,53.68 135.65,47.9 LED29.1 | OPTION_BUTTON..1 OPTION_BUTTON.1 99.59,128.01 NISTOR.4
  Bottom 0.152: v20.75,134.3 19.01,134.3 18.71,134 16.78,134 CAP7.1 | v50,21.8 45.51,21.8 45.21,22.1 43.28,22.1 CAP13.1 | CAP21.1 103.78,37.8 v107.25,37.8 112.68,37.8 123.32,27.16 126.13,27.16 128.03,29.06 135.17,29.06 135.3,28.93 135.3,27.09 135.17,26.96 134.87,26.96 134.15,26.24 134.15,11.84 SECONDARY_BOARD.2 | CAP26.1 98.98,113.8 v100.5,113.8 104.65,117.95 NISTOR.4
N$43
  Top 0.152: SECONDARY_BOARD.4 135.2,16.92 136.25,17.97 136.25,34.66 139.82,38.22 143.48,38.22 151.66,46.4 151.66,59.14 142.41,68.39 142.41,82.64 137.41,87.64 137.41,110.47 126.02,121.86 126.02,123.39 125.41,124 124,124 112.27,135.73 ARDUINO_PRO_MICRO.6
N$44
  Bottom 0.152: OPTION_BUTTON..3 OPTION_BUTTON.3 114.83,133.09 ARDUINO_PRO_MICRO.3
N$45
  Top 0.152: 150_OHMS.4 69,120.19 70.05,121.24 70.05,130.19 PROFILE_LED.1
N$46
  Top 0.152: 100_OHMS.4 74.77,120.41 PROFILE_LED.3
N$47
  Top 0.152: 100_OHMS..4 78,120.19 76.95,121.24 76.95,130.19 PROFILE_LED.4
N$48
  Top 0.152: 470_OHMS.4 17.22,20.14 17.22,23.97 LED1.4
N$49  (via drill 0.35)
  Top 0.152: CAP1.2 18.27,21.82 LED1.3 19.4,24.68 20.4,25.68 20.4,31.97 18.2,34.17 18.2,39.98 CAP2.2 18.27,40.82 LED2.3 19.4,43.68 20.3,44.58 20.3,48.06 20.4,48.16 20.4,50.97 18.2,53.17 18.2,55.2 18.27,55.27 CAP3.2 18.27,59.82 LED3.3 19.4,62.68 20.4,63.68 20.4,69.97 18.2,72.17 18.2,74.2 18.27,74.27 CAP4.2 19.4,79.18 LED4.3 19.4,81.68 20.4,82.68 20.4,88.97 18.2,91.17 18.2,93.2 18.27,93.27 CAP5.2 18.27,97.82 LED5.3 19.4,100.68 20.4,101.68 20.4,107.97 18.2,110.17 18.2,112.2 18.27,112.27 CAP6.2 18.27,116.82 LED6.3 19.4,119.68 20.4,120.68 20.4,126.97 18.2,129.17 18.2,131.2 18.27,131.27 CAP7.2 40.88,135.05 44.1,131.84 44.1,129.28 42.5,127.68 42.5,123.85 LED7.3 43.4,122.18 CAP8.2 42.27,112.27 42.2,112.2 42.2,110.17 44.4,107.97 44.4,101.68 43.4,100.68 LED8.3 43.4,98.18 CAP9.2 42.27,95.71 49.05,88.93 49.05,80.9 LED9.3 48.15,79.23 CAP10.2 49.45,75.67 49.45,72.17 51.65,69.97 51.65,61.95 LED10.3 50.65,60.18 CAP11.2 54.1,54.47 54.1,52.74 56.2,50.63 56.2,42.85 LED11.3 55.3,41.18 CAP12.2 54.17,35.75 51.95,33.53 51.95,31.77 46.8,26.62 46.8,23.85 LED12.3 45.9,22.18 CAP13.2 61.97,21.05 82.3,41.38 82.3,42.73 85.43,45.85 86.97,45.85 87.1,45.72 87.1,42.85 LED13.3 86.2,41.6 86.5,41.3 87,41.3 87.75,42.05 87.75,49.98 78.68,59.05 CAP14.2 76.95,60.18 LED14.3 76.95,62.68 77.85,63.58 77.85,69.63 70.82,76.66 CAP15.2 70.82,78.87 LED15.3 71.95,81.73 72.85,82.63 72.85,88.68 64.48,97.05 CAP16.2 62.35,98.18 LED16.3 63.35,99.95 63.35,107.97 61.15,110.17 61.15,112.2 61.22,112.27 CAP17.2 | v75,116.05 82.71,108.34 82.71,100.31 LED17.3 81.35,98.13 CAP18.2 86.62,90.7 89.84,90.7 91.85,88.68 91.85,80.9 LED18.3 90.95,79.23 CAP19.2 94.75,73.17 94.75,73.08 96.85,70.97 96.85,61.85 LED19.3 95.95,60.18 CAP20.2 101.22,52.65 104.09,52.65 106.1,50.63 106.1,42.85 LED20.3 105.2,41.18 CAP21.2 121.45,22.67 121.45,22.38 121.58,22.25 123.12,22.25 123.25,22.38 123.25,22.8 126.25,25.8 126.25,26.72 126.38,26.85 127.92,26.85 128.05,26.72 128.05,23.85 LED21.3
  Top 0.152: LED21.3 128.15,22.95 128.75,23.55 128.75,31.32 123.07,37 CAP22.2 123.07,40.82 LED22.3 124.2,43.68 125.1,44.58 125.1,45.72 124.9,45.93 124.9,50.84 123.09,52.65 120.22,52.65 CAP23.2 113.82,59.82 LED23.3 114.95,62.68 115.85,63.58 115.85,69.63 108.82,76.66 CAP24.2 109.95,79.23 LED24.3 109.95,81.73 110.95,82.73 110.95,89.02 102.92,97.05 CAP25.2 99.27,97.87 LED25.3 101.4,100 101.4,107.97 99.2,110.17 99.2,112.2 99.27,112.27 CAP26.2 104.87,110.45 108.06,110.45 108.86,109.65 108.86,109.32 119.22,98.95 119.25,98.95 | 119.25,98.95 LED26.3 | 119.25,98.95 119.25,98.03 CAP27.2 124.62,90.7 127.84,90.7 129.85,88.68 129.85,80.9 LED27.3 128.95,79.23 CAP28.2 127.82,73.73 129.9,71.65 132.84,71.65 134.65,69.84 134.65,64.93 134.85,64.72 134.85,61.85 LED28.3 133.95,60.18 CAP29.2 139.22,52.65 142.09,52.65 144.1,50.63 144.1,42.85 LED29.3 | PROFILE_LED.2 73.28,130.55 74.33,131.6 77.75,131.6 81.45,127.9 81.45,127.09 81.58,126.96 95.56,126.96 NISTOR.2 | LED21.3 134.15,15.95 134.15,10.35 135.2,9.3 SECONDARY_BOARD.1
  Bottom 0.152: v75,116.05 CAP17.2 | NISTOR.2 99.57,116.35 CAP26.2
N$50
  Bottom 0.152: 100_OHMS.1 76.03,126.76 77.08,125.71 109.37,125.71 121.25,137.59 121.25,137.8 121.25,138.71 120.45,139.51 116.17,139.51 ARDUINO_PRO_MICRO.5
N$51
  Top 0.152: LED1.2 20.1,28.45 20.1,31.84 17.22,34.72 17.22,42.97 LED2.4
N$52
  Top 0.152: LED2.2 18.75,46.1 18.75,46.94 20.1,48.28 20.1,50.84 17.22,53.72 17.22,61.97 LED3.4
N$53
  Top 0.152: LED3.2 20.1,66.45 20.1,69.84 17.22,72.72 17.22,80.97 LED4.4
N$54
  Top 0.152: LED4.2 14.6,80.79 20.1,86.28 20.1,88.84 17.22,91.72 17.22,99.97 LED5.4
N$55
  Top 0.152: LED5.2 14.6,99.79 20.1,105.28 20.1,107.84 17.22,110.72 17.22,118.97 LED6.4
N$56
  Top 0.152: LED6.2 20.1,123.45 20.1,126.84 17.22,129.72 17.22,135.49 17.83,136.1 40.26,136.1 44.4,131.97 44.4,127.15 LED7.4
N$57
  Top 0.152: LED7.2 39.8,122.95 40.78,121.97 40.78,111.15 44.1,107.84 44.1,105.28 43.4,104.59 LED8.4
N$58
  Top 0.152: LED8.2 39.45,98.1 40.65,98.1 40.78,97.97 40.78,96.77 44,93.55 44,90.21 42.67,88.89 42.67,86.33 44.48,84.52 46.45,84.52 47.77,83.2 LED9.4
N$59
  Top 0.152: LED9.2 44.2,79.15 45.4,79.15 45.53,79.02 45.53,77.82 49,74.35 49,72.18 51.35,69.84 51.35,64.85 LED10.4
N$60
  Top 0.152: LED10.2 46.7,60.1 47.9,60.1 48.03,59.97 48.03,58.77 51,55.8 51,52.01 49.82,50.84 49.82,48.28 52.96,45.15 LED11.4
N$61
  Top 0.152: LED11.2 51.35,41.1 52.55,41.1 52.68,40.97 52.68,34.7 51.64,33.65 51.64,31.89 LED12.4
N$62
  Top 0.152: LED12.2 41.95,22.1 43.15,22.1 43.72,21.54 43.72,20.61 44.33,20 61.35,20 82.61,41.25 82.61,41.56 LED13.4
N$63
  Top 0.152: LED13.2 81.4,43.68 82.3,44.58 82.3,46.7 80.72,48.28 80.72,50.91 81.35,51.54 81.35,52.66 76.02,58 75.38,58 74.77,58.61 74.77,61.97 LED14.4
N$64
  Top 0.152: LED14.2 72.15,62.68 73.05,63.58 73.05,65.7 71.47,67.28 71.47,69.91 72.1,70.54 72.1,74.95 69.77,77.29 69.77,81.02 LED15.4
N$65
  Top 0.152: LED15.2 67.15,81.73 68.05,82.63 68.05,84.75 66.47,86.33 66.47,88.96 67.1,89.59 67.1,90.71 62.01,95.8 60.98,95.8 60.17,96.61 60.17,97.49 61.25,98.57 61.25,101.05 LED16.4
N$66
  Top 0.152: LED16.2 63.05,104.45 63.05,107.84 60.25,110.63 60.25,115.53 60.17,115.61 60.17,116.49 60.78,117.1 61.66,117.1 63.62,115.14 74.8,115.14 82.1,107.84 82.1,105.28 81.35,104.54 LED17.4
N$67
  Top 0.152: LED17.2 77.4,98.1 78.65,98.1 78.78,97.97 78.78,97.23 79.22,96.8 79.22,96.61 84.33,91.5 85.31,91.5 86.1,90.71 86.1,89.52 85.47,88.89 85.47,86.33 88.61,83.2 LED18.4
N$68
  Top 0.152: LED18.2 87,79.15 88.2,79.15 88.33,79.02 88.33,77.82 91.5,74.65 91.5,70.86 90.47,69.84 90.47,67.28 92.28,65.47 94.3,65.47 95.62,64.15 LED19.4
N$69
  Top 0.152: LED19.2 92,60.1 93.2,60.1 93.33,59.97 93.33,58.77 97.65,54.45 97.65,51.54 99.72,49.46 99.72,48.28 102.86,45.15 LED20.4
N$70
  Top 0.152: LED20.2 101.6,41.95 103.02,40.54 103.02,39.61 120.69,21.94 123.25,21.94 123.56,22.25 123.56,22.56 LED21.4
N$71
  Top 0.152: LED21.2 125.94,26.54 125.94,26.85 127.81,28.72 127.81,31.83 122.25,37.39 122.25,39.38 122.02,39.61 122.02,42.97 LED22.4
N$72
  Top 0.152: LED22.2 119.4,43.68 120.3,44.58 120.3,46.7 118.72,48.28 118.72,49.46 113.5,54.69 113.5,57.88 112.77,58.61 112.77,61.97 LED23.4
N$73
  Top 0.152: LED23.2 110.15,62.68 111.05,63.58 111.05,65.7 109.47,67.28 109.47,69.91 110.1,70.54 110.1,71.66 107.77,74 107.77,81.02 LED24.4
N$74
  Top 0.152: LED24.2 110.65,85.5 110.65,88.89 103.54,96 98.83,96 98.22,96.61 98.22,100.02 LED25.4
N$75
  Top 0.152: LED25.2 101.1,104.5 101.1,107.84 98.22,110.72 98.22,116.49 98.83,117.1 102.1,117.1 117.06,102.15 LED26.4
N$76
  Top 0.152: LED26.2 115.4,98.1 116.65,98.1 117.22,97.54 117.22,96.61 122.33,91.5 123.31,91.5 124.1,90.71 124.1,89.52 123.47,88.89 123.47,86.33 125.28,84.52 127,84.52 128.32,83.2 LED27.4
N$77
  Top 0.152: LED27.2 125,79.15 126.2,79.15 126.33,79.02 126.33,74.43 129.1,71.66 129.1,70.47 128.47,69.84 128.47,67.28 131.61,64.15 LED28.4
N$78
  Top 0.152: LED28.2 130,60.1 131.2,60.1 131.33,59.97 131.33,59.05 136.93,53.45 137.56,53.45 138.35,52.66 138.35,51.47 137.72,50.84 137.72,48.28 139.53,46.47 141.05,46.47 142.37,45.15 LED29.4
N$79
  Bottom 0.152: ARDUINO_PRO_MICRO.4 118.4,139.2 120.33,139.2 120.94,138.59 120.94,137.71 109.99,126.76 100_OHMS..1
N$80  (via drill 0.35)
  Top 0.152: v125,135.8 122.65,138.15 ARDUINO_PRO_MICRO.2
  Bottom 0.152: SECONDARY_BOARD.3 135.2,14.38 136.25,15.43 136.25,28.84 135.3,29.79 135.3,33.71 139.82,38.22 143.48,38.22 151.35,46.09 151.35,56.2 142.1,65.45 142.1,79.45 137.1,84.45 137.1,93.7 127.88,102.93 127.86,102.94 127.55,103.25 127.55,133.25 v125,135.8
N$81
  Top 0.152: 470_OHMS.1 13.19,31.2 11.85,32.54 11.85,133.15 15.8,137.1 94.49,137.1 97.2,139.81 123.31,139.81 ARDUINO_PRO_MICRO.1